# Altium PCB PowerBoard.PcbDoc
Units mil, origin at the board's own origin, x right, y up, seen from the top; angles counter-clockwise.
Board outline 1920 x 1505 mil, 2 copper layers (Top Layer, Bottom Layer); 17 components, 9 nets, 42 pads, 1 vias.
Unrouted connection lines stored in the file: 23.
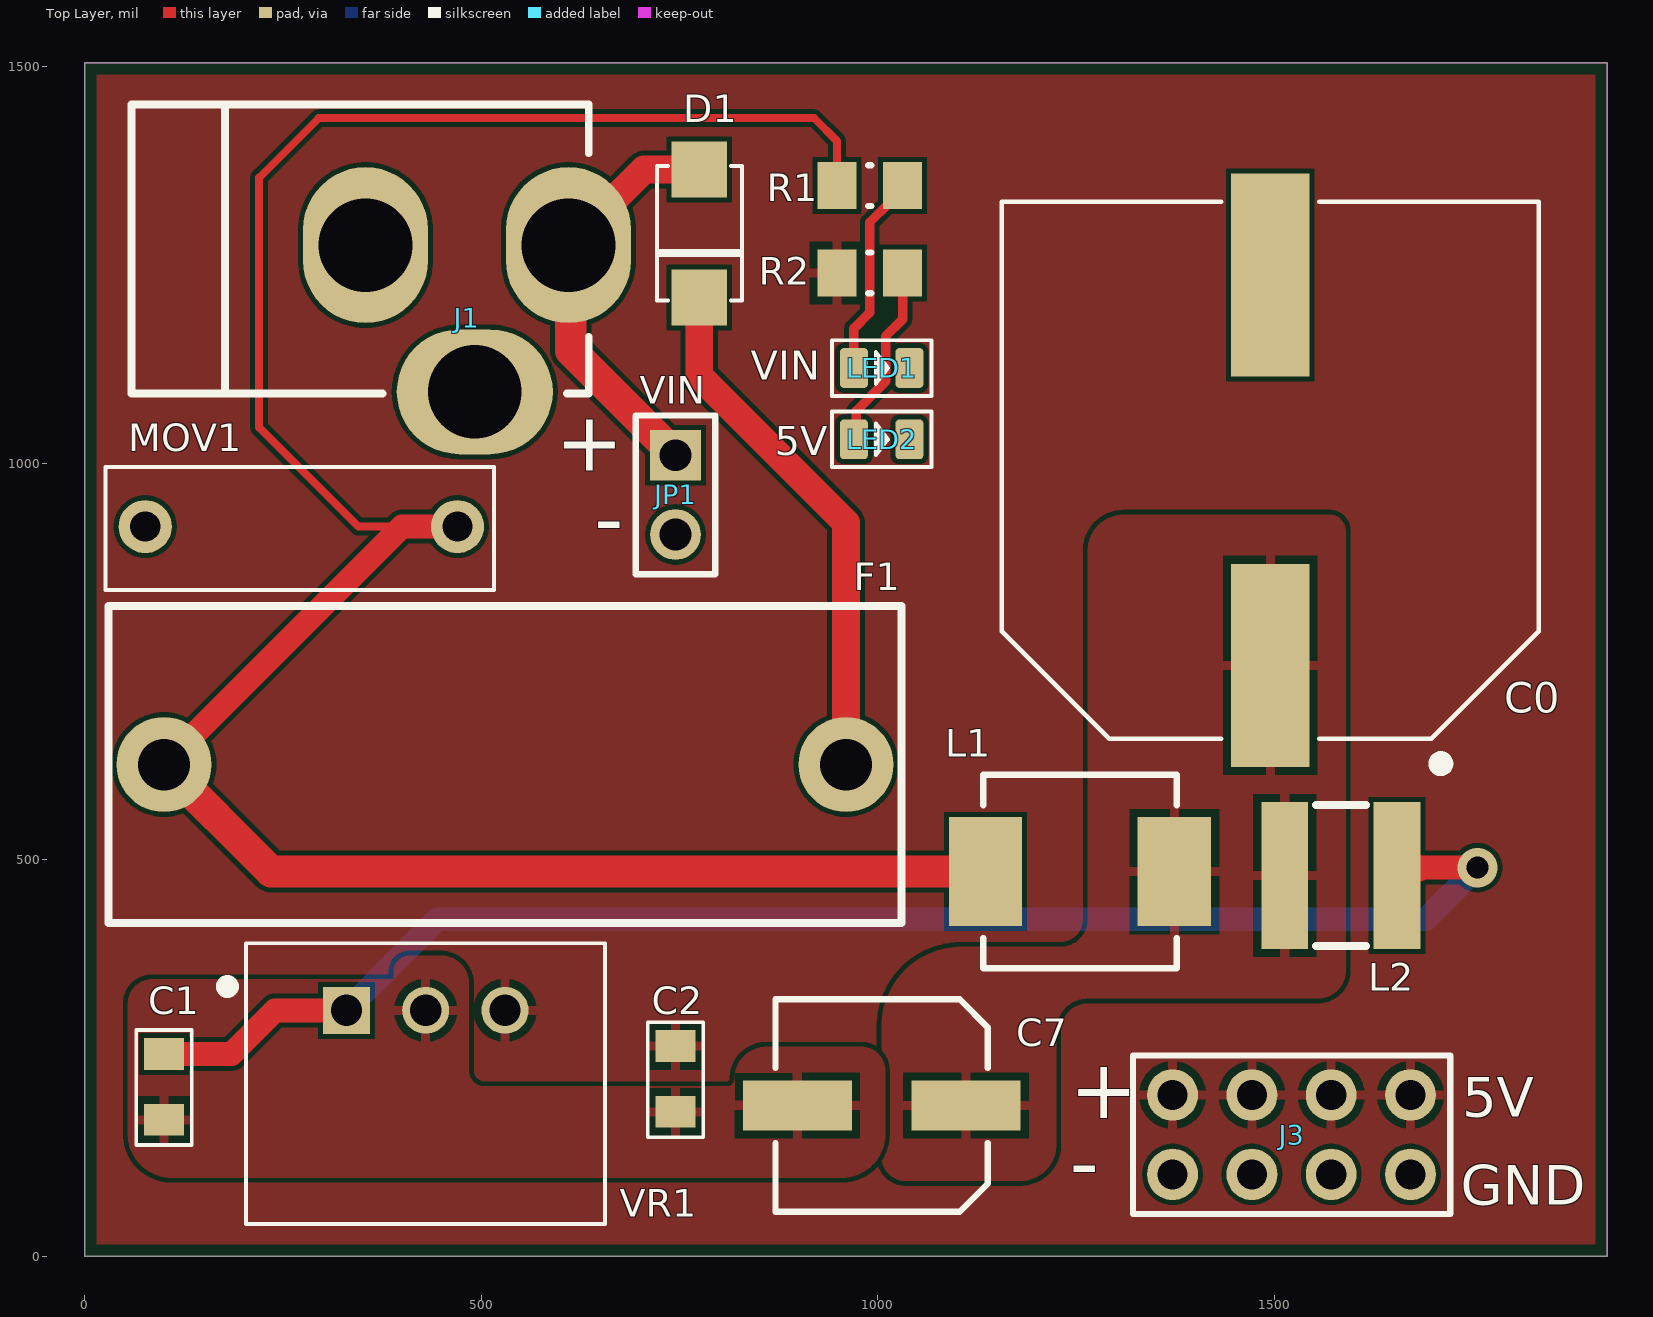
[diagram p0: Top Layer view]
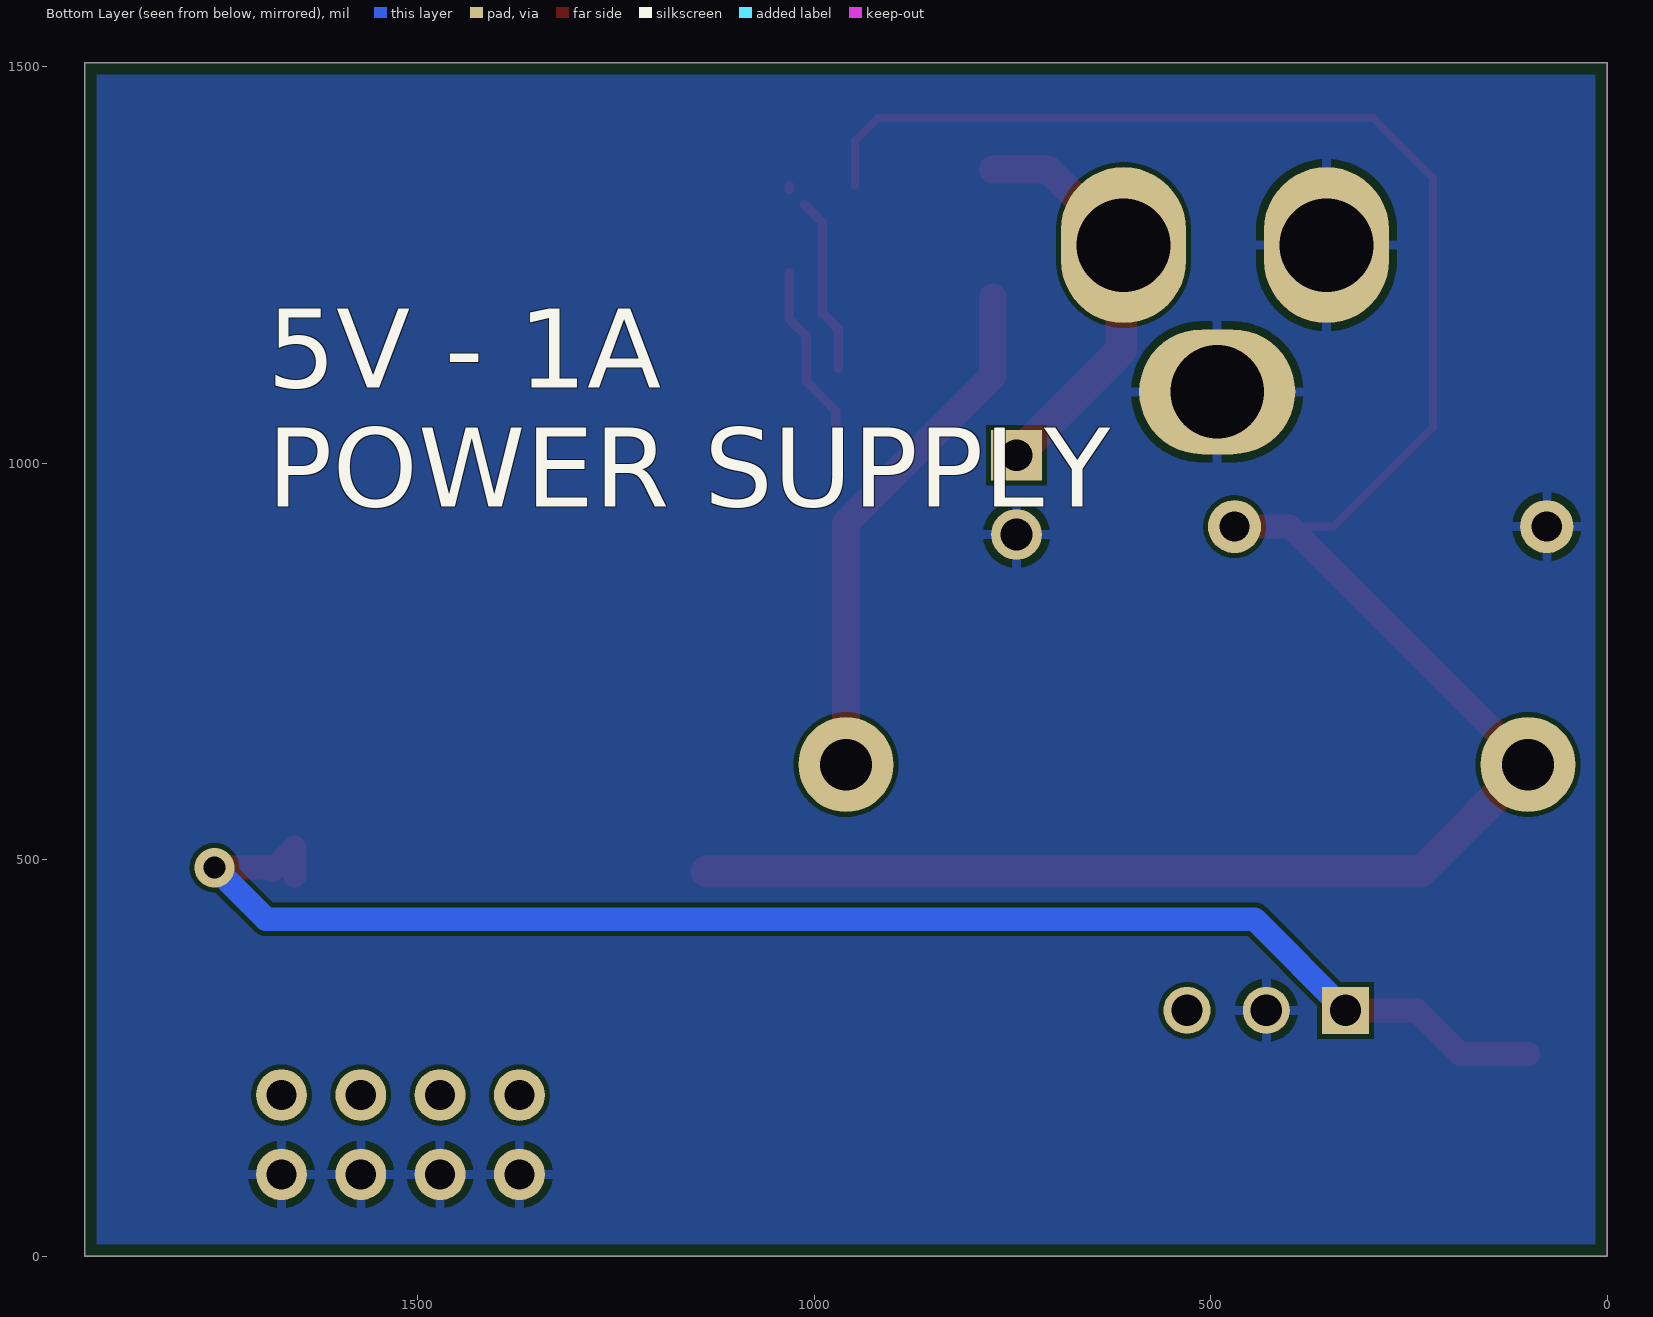
[diagram p1: Bottom Layer view, seen from below]

## Layer stack, top to bottom
Top Solder: solder mask 0.4, Solder Resist, Dk 3.5
Top Layer: signal copper 1.4
Dielectric 1: dielectric 12.6, FR-4, Dk 4.8
Bottom Layer: signal copper 1.4
Bottom Solder: solder mask 0.4, Solder Resist, Dk 3.5

## Board outline
0,0 1920,0 1920,1505 0,1505

## Design rules (kind name [scope] priority, off if disabled: settings)
BoardOutlineClearance [All] p1: gap=15 ignorepadtopadclearanceinfootprint=FALSE
Clearance [All] p1: gap=6 ignorepadtopadclearanceinfootprint=FALSE
ComponentClearance [All] p1 off: gap=10 collisioncheckmode=3 verticalgap=10 showdistances=FALSE
HoleToHoleClearance [All] p1: gap=5 allowstackedmicrovias=TRUE
PolygonConnect [All] p1: thpad.connectstyle=Relief thpad.reliefconductorwidth=12 thpad.reliefentries=4 thpad.polygonreliefangle="90 Angle" thpad.airgapwidth=10 smdpad.connectstyle=Relief smdpad.reliefconductorwidth=12 smdpad.reliefentries=4 smdpad.polygonreliefangle="90 Angle" smdpad.airgapwidth=10 via.connectstyle=Relief via.reliefconductorwidth=10 via.reliefentries=4 via.polygonreliefangle="90 Angle" via.airgapwidth=10
RoutingVias [All] p1: holewidth=28 width=50 viastyle="Through Hole" minholewidth=28 minwidth=50 maxholewidth=28 maxwidth=50
SilkToSilkClearance [All] p1 off: silktosilkclearance=10
SilkToSolderMaskClearance [IsPad] p1 off: minsilkscreentomaskgap=10 clearancetoexposedcopper=TRUE
SolderMaskExpansion [All] p1: expansion=4
Width [All] p1: maxlimit=200 minlimit=6 preferedwidth=10
26 further rules are at their usual default settings.

## Components (designator, comment, footprint, x,y, rotation, side; value= is the part's Value field where it differs from the comment)
C0 "CAP_UC" PCBComponent_1 1495,991.06 r180 top value=680uF
C1 "10uF" RES_0805 100,255 r270 top
C2 "22uF" RES_0805 745,265 r270 top
C7 "47uF" NIC-CAPA2-6.3X5.8_V 1005,190 r180 top
D1 "1N5400" DO-214AC 775,1290 r270 top
F1 "FUSE_5MM" FUSE_5MM 960,620 r180 top
J1 "PJ-002AH" POWER_JACK_5.5_2.1MM_NS 482.05,1182.48 r90 top
J3 "Power Connection" HDR2X4_CEN 1371.85,203.19 r0 top
JP1 "VIN" HDR1X2 745,1010 r270 top
L1 "82uH" CODACA_CSAB0630-100M_0 1255,485 r0 top
L2 "12uH" INDUCTOR 1513.27,480 r0 top
LED1 "VIN" LED-0805 1005,1120 r0 top
LED2 "5V" LED-0805 1005,1030 r0 top
MOV1 "MOV_7MM" MOV_7MM 276.3,920 r180 top value={Value}
R1 "2.2K" RESC0805(2012)_M 990,1350 r180 top
R2 "1K" RESC0805(2012)_M 990,1240 r180 top
VR1 "VX7805-1000" VX7805-1000 330,310 r0 top

## Footprints (in the part's own frame and the unit in brackets; to place one, negate y for a bottom-side part, rotate by r counter-clockwise, add the part's x,y. Pads: shape width x height; smd on the part's side, far side on the other; paste and mask are expansions set on the pad)
CODACA_CSAB0630-100M_0 [mm]
  rect 2.35x3.5 smd paste+0 mask+0: 1(-3.025,0) 2(3.025,0)
  silkscreen extent -3.1,-3.1 3.1,3.1, body extent -4.3,-3.2 4.3,3.2, height 0.25
DO-214AC [mil]
  rect 71x70 smd: 1(-80.39,0) 2(81,0)
  silkscreen extent -85,-53 85,54
FUSE_5MM [mil]
  round 120 hole 65: 1(0,0) 2(860,0)
  silkscreen extent -70,-200 930,200
HDR1X2 [mil] "Connector; Header; 2 Position"
  rect 64x64 hole 40: 1(0,0)
  round 64 hole 40: 2(100,0)
  silkscreen extent -50,-50 150,50
HDR2X4_CEN [mil] "Connector; Header; 4x2 Position"
  oval 64x65 hole 38: 1(0,0) 2(100,0) 3(200,0) 4(300,0) 5(0,-100) 6(100,-100) 7(200,-100) 8(300,-100)
  silkscreen extent -50,-150 350,50
INDUCTOR [mm]
  rect 1.5x4.7 smd: 1(0,0) 2(3.6,0)
  silkscreen extent 1,-2.26 2.6,2.26
LED-0805 [mil]
  rrect25% 35x50 smd: +(-35,0) -(35,0)
  silkscreen extent -62,-35 63,35
MOV_7MM [mil]
  round 67 hole 38: 1(-193.7,0) 2(200,0)
  silkscreen extent -240,-75 250,80
NIC-CAPA2-6.3X5.8_V [mm] "Aluminum Electrolytic Capacitor, Diameter 6.3mm, Height 6.1mm, Pitch 5.4mm"
  rect 3.5x1.6 smd: 1(-2.7,0) 2(2.7,0)
  silkscreen extent -3.4,-3.4 3.4,3.4, body extent -3.14,-3.12 3.14,3.15, height 6.1
PCBComponent_1 [mm]
  rect 2.5x6.5 smd: 1(0,6.25) 2(0,-6.25)
  silkscreen extent -8.6,-8.6 8.6,9.6
POWER_JACK_5.5_2.1MM_NS [mm]
  oval 5x4 hole 3: 1(2.35,-3.25) 2(2.35,3.25)
  oval 4x5 hole 3: 3(-2.35,-0.25)
  silkscreen extent -2.4,-3.9 6.85,10.75, body extent -2.55,-3.9 6.85,10.5, height 11
RES_0805 [mil]
  rect 40x51 smd: 1(0,0) 2(83,0)
  silkscreen extent -30,-35 115,35
RESC0805(2012)_M [mm] "Chip Resistor, Body 2.0x1.3mm, IPC Low Density"
  rect 1.25x1.5 smd: 1(-1.05,0) 2(1.05,0)
  silkscreen extent -0.05,-0.65 0.05,0.65, body extent -1.1,-0.67 1.1,0.67, height 0.7
VX7805-1000 [mm] "Non-Isolated DC-DC Convertor"
  rect 1.508x1.508 hole 1: 1(0,0)
  round 1.508 hole 1: 2(2.54,0) 3(5.08,0)
  silkscreen extent -3.99,-6.85 8.29,2.15, body extent -3.21,-6.84 8.29,2.16, height 17.64

## Part data
C0: "CAP_UC_30D", Voltage=50V
C1 C2: library part CAP_0805, "0805 SMD Ceramic Cap"
C7: library part CAP_UC, "CAP_UC_30D", Voltage=50V
D1: library part "D Schottky", "Schottky Diode", Code_JEDEC=DO-214-AA, LatestRevisionDate=17-Jul-2002, LatestRevisionNote="Re-released for DXP Platform.", PackageDescription="DO-214-AA/SMB; 2 C-Bend Leads; Body 5.3 x 3.6 mm, inc. leads (LxW)", PackageReference=SMB, Published=8-Jun-2000, Publisher="Altium Limited"
J1: "CONN PWR JACK 2.1X5.5MM HIGH CUR", Color=Black, Current Rating=5A, Manufacturer="CUI Inc", Operating Temperature="-25°C ~ 85°C", Supplier Part Number=CP-002AH-ND, Voltage - Rated=24VDC, .Checked PCB=used, .Checked SCH=used, Category="Connectors, Interconnects", ComponentLink1Description=http://products.cui.com/GetSpecForDigiKey.aspx?MFGNum=PJ-002AH, ComponentLink1URL=http://products.cui.com/GetSpecForDigiKey.aspx?MFGNum=PJ-002AH, Connector Type=Jack, Contact Material="Copper Alloy", Contact Material - Plating=Nickel, Family="Barrel - Power", Features=-, Gender=Male, Housing Color=Black, Housing Material=Thermoplastic, Internal Switch(s)="Single Switch, Normally Closed", Manufacturer Part Number=PJ-002AH, Mating connector="2.1mm ID, 5.5mm OD", Mounting Type="Through Hole, Right Angle", Number of Positions/Contacts="2 Conductors, 3 Contacts", Plug/Mating Plug Diameter="2.1mm ID, 5.5mm OD", Price 1k [$]=0.23625, Pricing 1="1=1.01, 10=0.704, 100=0.4724, 500=0.3819, 1000=0.3417, 2500=0.27135 (USD)", RoHS="RoHS Compliant", Shielding=Unshielded, Stock 1=138933, Supplier=Digikey, Supplier 1=Digi-Key, Supplier Part Number 1=CP-002AH-ND, Termination="Solder Eyelet(s)"
J3: library part "Header 4X2A", "Header, 4-Pin, Dual row", LatestRevisionDate=17-Jul-2002, LatestRevisionNote="Re-released for DXP Platform.", Publisher="Altium Limited"
JP1: library part "Header 2", "Header, 2-Pin", LatestRevisionDate=17-Jul-2002, LatestRevisionNote="Re-released for DXP Platform.", Publisher="Altium Limited"
L1 L2: library part CSAB0630-100M, Part Number=CSAB0630-100M
LED1 LED2: library part SMD-LED-CLEAR-RED(0805), MPN=17-215SURC/S530-A2/TR8
MOV1: MFR P/N=S20K30
R1 R2: library part MCPWR05FTEW2005, POWERRATING=125mW, Tolerance="± 1%", MPN=MCPWR05FTEW2005, OC_FARNELL=1887395, OC_NEWARK=43T5453, Supplier=MULTICOMP
VR1: "1 A Output Current, 6~36 Vdc Input, 3 Pin SIP, Non-Isolated, Dc-Dc Converter", Package="SIP-3 CUI", ComponentLink1Description=Datasheet, ComponentLink1URL=https://www.cui.com/product/resource/vx78-1000.pdf, CUI_purchase_URL=https://www.cui.com/product/dc-dc-converters/non-isolated/vx78-1000-series?utm_source=snapeda.com&utm_medium=referral&utm_campaign=snapedaBOM, Digi-Key_Part_Number=102-4253-ND, Digi-Key_Purchase_URL=https://www.digikey.com/product-detail/en/cui-inc/VX7805-1000/102-4253-ND/7350292?utm_source=snapeda&utm_medium=aggregator&utm_campaign=symbol, MF="CUI Inc.", MP=VX7805-1000, SnapEDA_Link=https://www.snapeda.com/parts/VX7805-1000/CUI%20Inc./view-part/?ref=snap

## Via types
v1: diameter 50, hole 28, Top Layer to Bottom Layer, tented both sides, 1 vias

## Nets (pads, with @x,y where several pads share a name; then routed paths per layer and width w, separated by ;. In a path a pad name is that pad's centre, name@x,y a point inside that pad or via, vN(x,y) a via of type N, cw(c..) or ccw(c..) an arc to the next point about the centre after c; other vN are vias at no path point)
GND: C0.2 C1.2 C2.2 C7.2 J1.2 J1.3 J3.5 J3.6 J3.7 J3.8 JP1.2 LED1.- LED2.- MOV1.2 VR1.2
NetC0_1: C0.1 C7.1 L1.2 L2.1
NetD1_1: D1.1 J1.1 JP1.1 | length 539.6
  Top Layer w32: J1.1@632.95,1292.52 J1.1@642.95,1282.52
  Top Layer w35: J1.1 705.39,1370.39 D1.1
  Top Layer w40: J1.1 612.95,1272.05 612.95,1142.05 JP1.1
NetD1_2: D1.2 F1.1 | length 665.6
  Top Layer w35: D1.2 775,1110 960,925 F1.1
NetF1_2: F1.2 L1.1 MOV1.1 R1.2 | length 3030.8
  Top Layer w10: MOV1.1 345,920 220,1045 220,1360 295,1435 920,1435 948.66,1406.34 R1.2
  Top Layer w30: F1.2 400,920 MOV1.1
  Top Layer w40: F1.2 235,485 L1.1
NetLED1_+: LED1.+ R1.1 | length 229.1
  Top Layer w12: LED1.+ 970,1170 990,1190 990,1303.74 R1.1@1012.73,1326.47 ; R1.1@1031.34,1345.08 R1.1
NetLED2_+: LED2.+ R2.1 | length 235.4
  Top Layer w12: LED2.+ 972.88,1032.88 972.88,1065.97 1010,1103.09 1010,1160 1031.34,1181.34 R2.1
VCC: C2.1 J3.1 J3.2 J3.3 J3.4 R2.2 VR1.3
Vin: C1.1 L2.2 VR1.1 | length 1903
  Top Layer w30: C1.1 185,255 240,310 VR1.1 ; L2.2 1655,515.47 1682.74,487.74 1685,490 v1(1756.41,490)
  Bottom Layer w30: VR1.1 445,425 1691.41,425 v1(1756.41,490)

## Polygon pours and split planes (outlines as drawn)
GND on Top Layer "GND_L01_P023" (solid, remove dead copper, pour order 23): 389.5,349 84.5,349 ccw(c84.5,319) 54.5,319 54.5,154 ccw(c109.5,154) 109.5,99 954.5,99 ccw(c954.5,154) 1009.5,154 1009.5,234 ccw(c979.5,234) 979.5,264 859.5,264 ccw(c859.5,224) 819.5,224 cw(c809.5,224) 809.5,214 504.5,214 cw(c504.5,234) 484.5,234 484.5,344 ccw(c449.5,344) 449.5,379 409.5,379 ccw(c409.5,359) 389.5,359
VCC on Top Layer "VCC_L01_P025" (solid, remove dead copper, pour order 25): 0,0 0,1505 1920,1505 1920,0
NetC0_1 on Top Layer "NETC0_1_L01_P024" (solid, remove dead copper, pour order 24): 1005,125 ccw(c1035,125) 1035,95 1180,95 ccw(c1180,140) 1225,140 1225,285 cw(c1265,285) 1265,325 1555,325 ccw(c1555,360) 1590,360 1590,915 ccw(c1570,915) 1570,935 1310,935 ccw(c1310,890) 1265,890 1265,425 cw(c1230,425) 1230,390 1105,390 ccw(c1105,290) 1005,290
no net on Top Layer "NONET_L01_P022" (solid, remove dead copper, shelved, pour order 22): 550,880
GND on Bottom Layer "GND_L02_P026" (solid, remove dead copper, pour order 26): 0,0 0,1505 1920,1505 1920,0

## Keep-outs
Keep-Out Layer:
  the board outline again, w1

## Silkscreen, mask and mechanical layers (free items; w line width, h text height)
Top Overlay:
  text "+" at 680,1055 h75 r180
  text "-" at 680,950 h75 r180
  text "5V" at 1736.85,175.87 h50
  text "GND" at 1735,65 h50
Bottom Overlay:
  text "5V - 1A / POWER SUPPLY" at 1690,945 h100

## Text inside footprints (layer, text, board x,y; h text height)
J3: Top Overlay "+" at 1241.85,238.19 h75 r180; Top Overlay "-" at 1241.85,138.19 h75 r180